# EAGLE board qb1_2a (EAGLE 6.2)
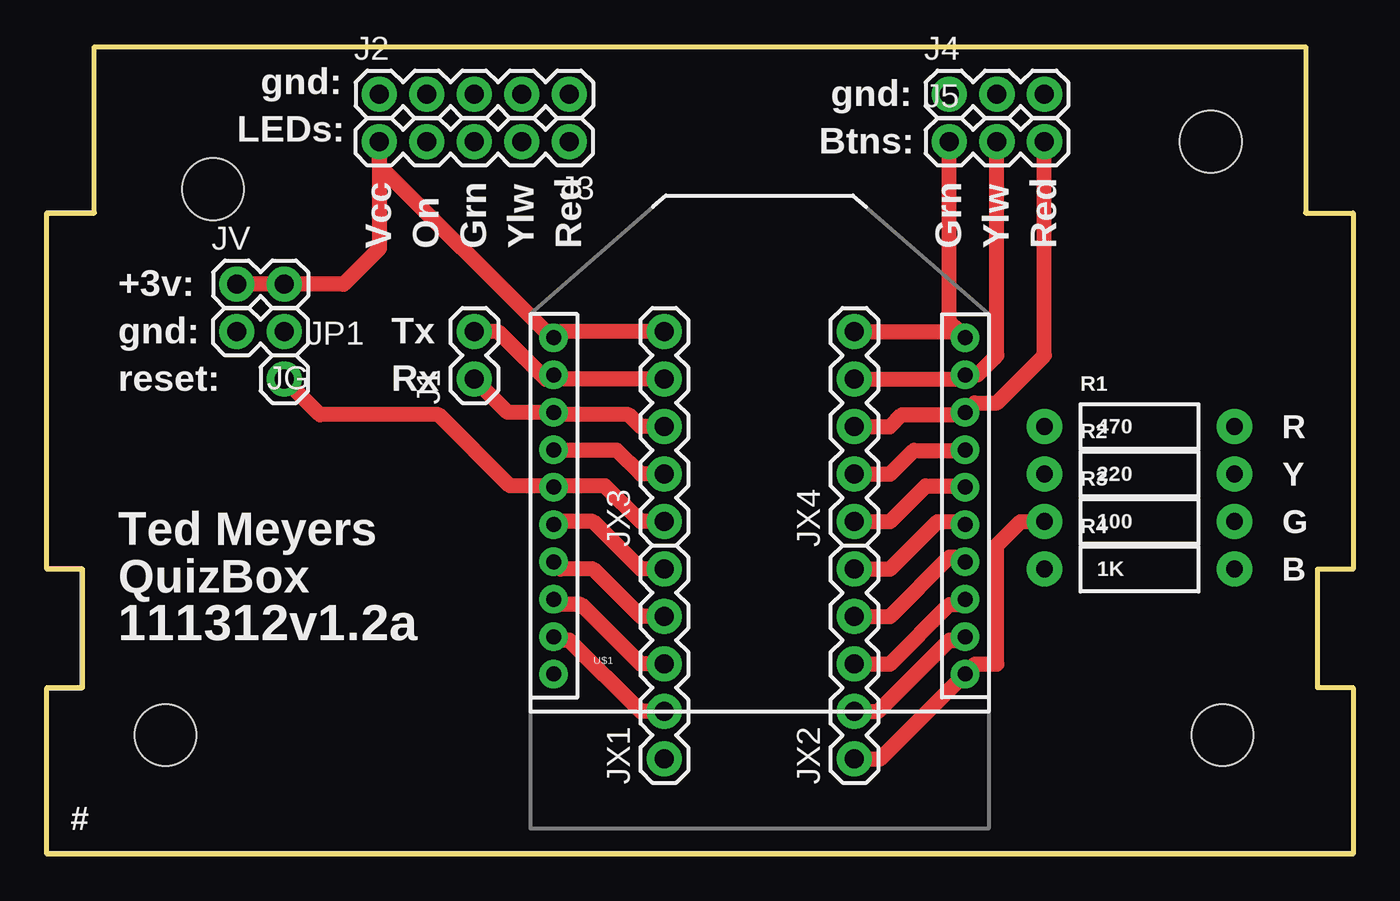
[diagram p0: board, top side]
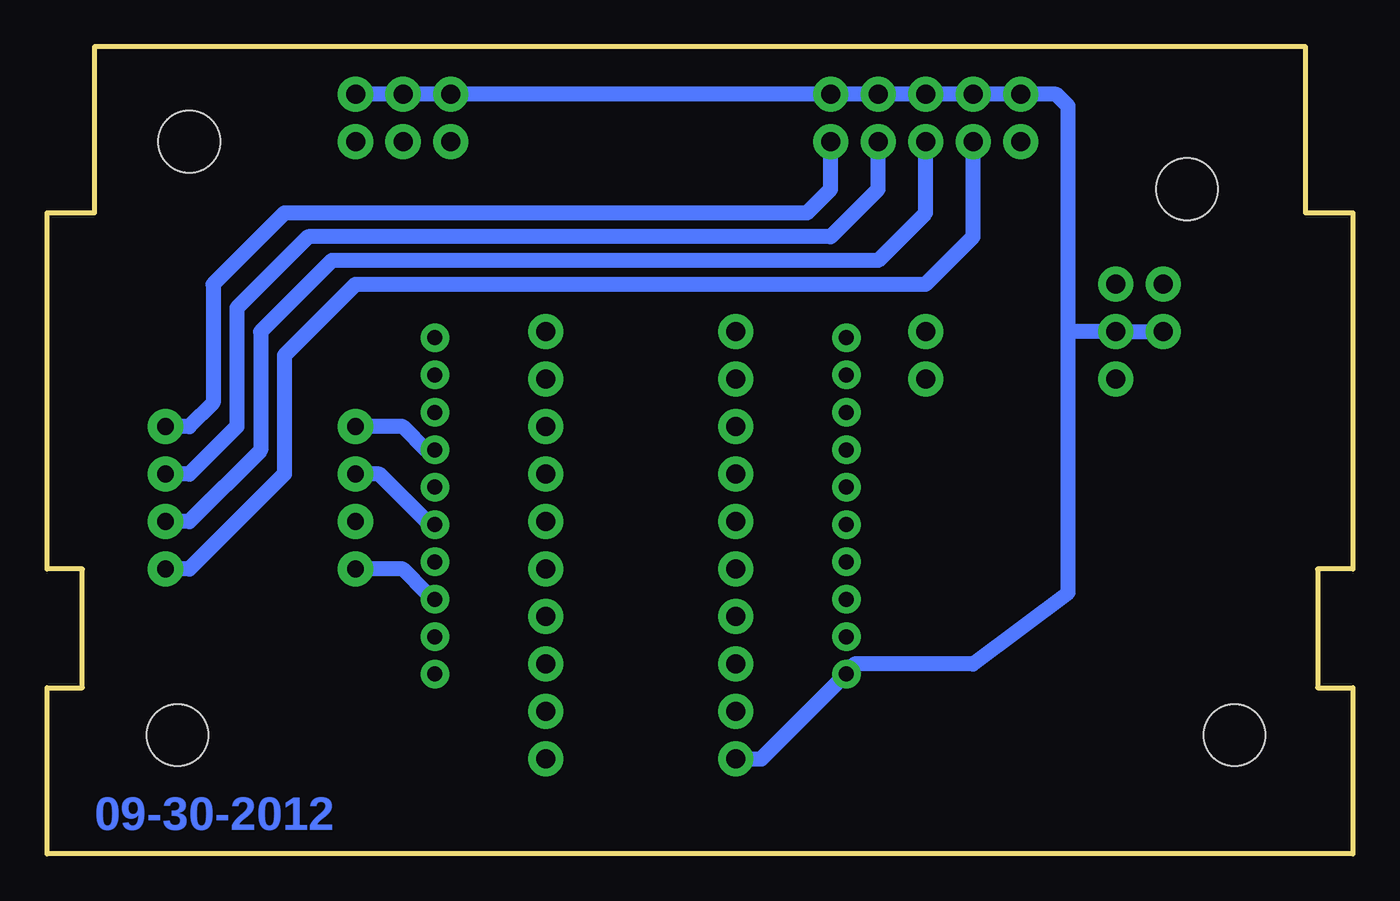
[diagram p1: board, bottom side, seen from below]

Size 69.85 x 43.18 mm. Coordinates in mm from the lower left corner, seen from the top.
Outline: 0,0 0,8.89 1.91,8.89 1.91,15.24 0,15.24 0,34.29 2.54,34.29 2.54,43.18 67.31,43.18 67.31,34.29 69.85,34.29 69.85,15.24 67.94,15.24 67.94,8.89 69.85,8.89 69.85,0 0,0
Copper layers (1*16): Top 0.035mm / dielectric 1.5mm / Bottom 0.035mm
Design rules: minimum track width 6mil, minimum drill 12mil, track to track 6mil, track to pad 6mil, pad to pad 6mil, via to via 6mil, smd to smd 0mil, copper to edge 10mil, drill to drill 10mil, minimum pad ring 10mil, minimum via ring 6mil, stop-mask expansion 2mil, vias tented up to drill 100mil, thermal gap 10mil

## Footprints (pad centres in the part's own frame; a part is rotated, then mirrored left to right if it is on the bottom)
1X02 = drill 1.016 pad 1.88: 1 0,0; 2 2.54,0
1X05 = drill 1.016 pad 1.88: 1 0,0; 2 2.54,0; 3 5.08,0; 4 7.62,0; 5 10.16,0
1X03 = drill 1.016 pad 1.88: 1 0,0; 2 2.54,0; 3 5.08,0
1X01 = drill 1.016 pad 1.88: 1 0,0
STAND-OFF = hole 3.302: 0,0
AXIAL-0.4 = drill 0.9 pad 1.88: P$1 -5.08,0; P$2 5.08,0
XBEE-SILK = drill 0.8 pad 1.524: 1 -11,20; 2 -11,18; 3 -11,16; 4 -11,14; 5 -11,12; 6 -11,10; 7 -11,8; 8 -11,6; 9 -11,4; 10 -11,2; 11 11,2; 12 11,4; 13 11,6; 14 11,8; 15 11,10; 16 11,12; 17 11,14; 18 11,16; 19 11,18; 20 11,20

## Placement (x,y rotation side)
J1  [1X02]  22.86,25.4 90 top
J2  [1X05]  17.78,40.64 0 top
J3  [1X05]  27.94,38.1 180 top
J4  [1X03]  48.26,40.64 0 top
J5  [1X03]  48.26,38.1 0 top
JG  [1X02]  12.7,27.94 180 top
JP1  M01PTH  [1X01]  12.7,25.4 0 top
JP6  STAND-OFF  [STAND-OFF]  6.35,6.35 0 top
JP7  STAND-OFF  [STAND-OFF]  8.89,35.56 0 top
JP8  STAND-OFF  [STAND-OFF]  62.23,38.1 0 top
JP9  STAND-OFF  [STAND-OFF]  62.87,6.35 0 top
JV  [1X02]  10.16,30.48 0 top
JX1  [1X05]  33.02,5.08 90 top
JX2  [1X05]  43.18,5.08 90 top
JX3  [1X05]  33.02,17.78 90 top
JX4  [1X05]  43.18,17.78 90 top
R1  470  [AXIAL-0.4]  58.42,22.86 0 top
R2  220  [AXIAL-0.4]  58.42,20.32 0 top
R3  100  [AXIAL-0.4]  58.42,17.78 0 top
R4  1K  [AXIAL-0.4]  58.42,15.24 0 top
U$1  XBEE-1B2  [XBEE-SILK]  38.1,7.62 0 top

## Library data of the parts
J1-J5 JG JP1 JP6-JP9 JV JX1-JX4 R1-R4 U$1 = SparkFun

## Nets
GND: J2.1 J2.2 J2.3 J2.4 J2.5 J4.1 J4.2 J4.3 JG.1 JG.2 JX1.1 U$1.10
N$1: JX4.2 R1.P$1 U$1.17
N$3: JX2.1 R3.P$1 U$1.11
N$4: J3.1 R1.P$2
N$5: J3.2 R2.P$2
N$6: J3.3 R3.P$2
N$7: J3.4 R4.P$2
N$8: J1.2 JX3.4 U$1.2
N$9: J1.1 JX3.3 U$1.3
N$10: J5.2 JX4.4 U$1.19
N$11: J5.1 JX4.5 U$1.20
N$12: J5.3 JX4.3 U$1.18
N$13: JX2.3 R4.P$1 U$1.13
N$14: JP1.1 JX3.1 U$1.5
S$1: JX1.2 U$1.9
S$2: JX4.1 U$1.16
S$3: JX1.3 U$1.8
S$4: JX1.4 U$1.7
S$5: JX1.5 U$1.6
S$6: JX2.4 U$1.14
S$7: JX3.2 U$1.4
S$10: JX2.2 U$1.12
S$13: JX2.5 R2.P$1 U$1.15
VDD: J3.5 JV.1 JV.2 JX3.5 U$1.1

## Tracks (layer width: path | path; a pad name or v marks a point on that pad's centre or on a via)
GND
  Bottom 0.813: J4.3 J4.2 J4.1 J2.5 J2.4 J2.3 J2.2 J2.1 15.88,40.64 15.24,40.01 15.24,27.94 | JX1.1 31.64,5.08 U$1.10 26.67,10.16 20.32,10.16 15.24,13.97 15.24,27.94 | 15.24,27.94 JG.1 JG.2
N$1
  Top 0.813: JX4.2 45.09,20.32 46.35,21.59 49.07,21.59 U$1.17
  Bottom 0.813: R1.P$1 50.8,22.86 49.53,21.59 U$1.17
N$3
  Top 0.813: R3.P$1 52.07,17.78 50.8,16.51 50.8,10.16 49.64,10.16 U$1.11 44.56,5.08 JX2.1
N$4
  Bottom 0.813: J3.1 27.94,35.56 29.21,34.29 57.15,34.29 60.96,30.48 60.96,24.13 62.23,22.86 R1.P$2
N$5
  Bottom 0.813: J3.2 25.4,35.56 27.94,33.02 55.88,33.02 59.69,29.21 59.69,22.86 62.23,20.32 R2.P$2
N$6
  Bottom 0.813: J3.3 22.86,34.29 25.4,31.75 54.61,31.75 58.42,27.94 58.42,21.59 62.23,17.78 R3.P$2
N$7
  Bottom 0.813: R4.P$2 62.23,15.24 57.15,20.32 57.15,26.67 53.34,30.48 22.86,30.48 20.32,33.02 J3.4
N$8
  Top 0.813: J1.2 24.13,27.94 26.67,25.4 U$1.2 27.32,25.4 JX3.4
N$9
  Top 0.813: J1.1 24.64,23.62 U$1.3 27.23,23.5 31.11,23.5 31.75,22.86 JX3.3
N$10
  Top 0.813: J5.2 50.8,26.67 49.75,25.62 U$1.19 48.88,25.4 JX4.4
N$11
  Top 0.813: J5.1 48.26,28.46 48.52,28.2 | U$1.20 48.52,28.2 | JX4.5 48.26,27.94 48.52,28.2
N$12
  Top 0.813: J5.3 53.34,26.67 50.8,24.13 49.61,24.13 U$1.18 48.98,23.5 45.72,23.5 45.09,22.86 JX4.3
N$13
  Top 0.813: JX2.3 45.09,10.16 48.26,13.34 48.81,13.34 U$1.13
  Bottom 0.813: R4.P$1 50.8,15.24 49.53,13.97 U$1.13
N$14
  Top 0.813: JX3.1 31.75,17.78 29.84,19.68 27.16,19.68 U$1.5 27.04,19.68 24.77,19.68 20.95,23.5 14.61,23.5 JP1.1
S$1
  Top 0.813: JX1.2 31.75,7.62 27.94,11.43 27.29,11.43 U$1.9
S$2
  Top 0.813: JX4.1 45.09,17.78 46.99,19.68 49.03,19.68 U$1.16
S$3
  Top 0.813: JX1.3 31.75,10.16 28.57,13.34 27.39,13.34 U$1.8
S$4
  Top 0.813: JX1.4 31.75,12.7 29.21,15.24 27.48,15.24 U$1.7
S$5
  Top 0.813: JX1.5 31.75,15.24 29.21,17.78 27.26,17.78 U$1.6
S$6
  Top 0.813: JX2.4 45.09,12.7 48.26,15.88 48.84,15.88 U$1.14
S$7
  Top 0.813: JX3.2 31.75,20.32 30.48,21.59 27.13,21.59 U$1.4
S$10
  Top 0.813: JX2.2 44.45,7.62 48.26,11.43 48.91,11.43 U$1.12
S$13
  Top 0.813: JX2.5 45.09,15.24 47.62,17.78 48.94,17.78 U$1.15
  Bottom 0.813: R2.P$1 52.07,20.32 49.53,17.78 U$1.15
VDD
  Top 0.813: JX3.5 27.42,27.94 U$1.1 26.67,27.94 17.78,36.83 J3.5 17.78,32.38 15.88,30.48 JV.2 JV.1

## Text on the board
Bottom: 09-30-2012
tPlace: gnd: | gnd: | LEDs: | Btns: | Vcc | On | Grn | Ylw | Red | Grn | Ylw | Red | +3v: | gnd: | Tx | reset: | Rx | R | Y | G | Ted Meyers | B | QuizBox | 111312v1.2a | #